# Altium PCB IRsense.PcbDoc
Units mil, origin at the board's own origin, x right, y up, seen from the top; angles counter-clockwise.
Board outline 1250 x 2200 mil, 2 copper layers (Top Layer, Bottom Layer); 25 components, 20 nets, 72 pads, 1 vias.
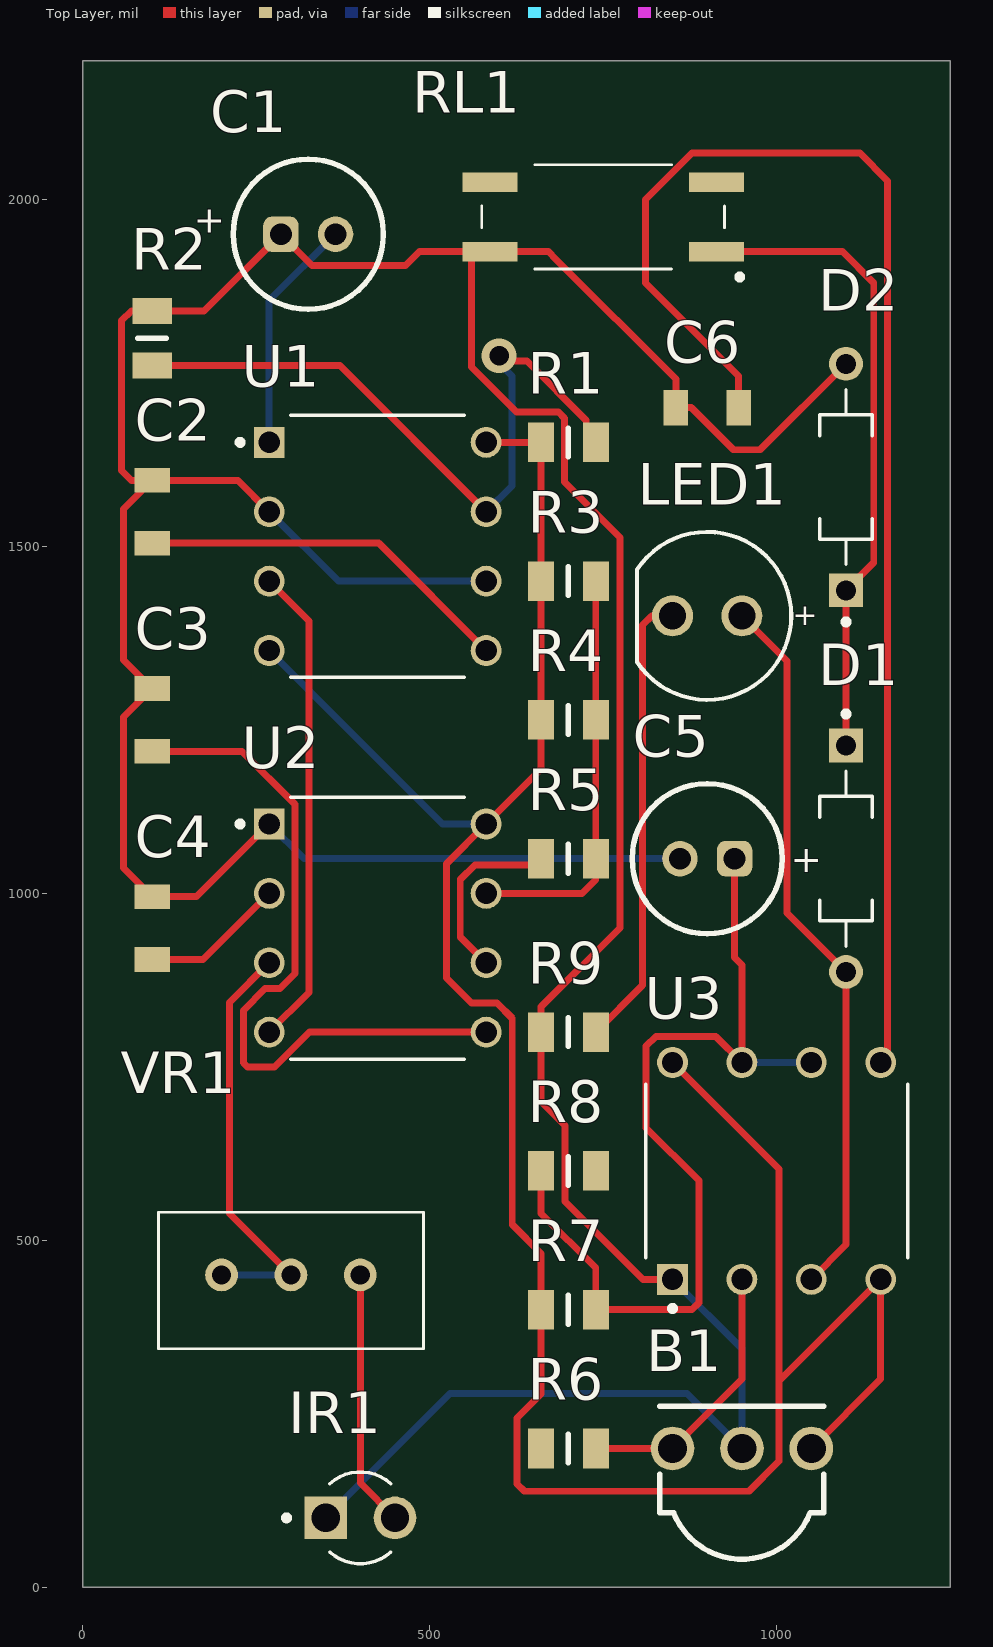
[diagram p0: Top Layer view]
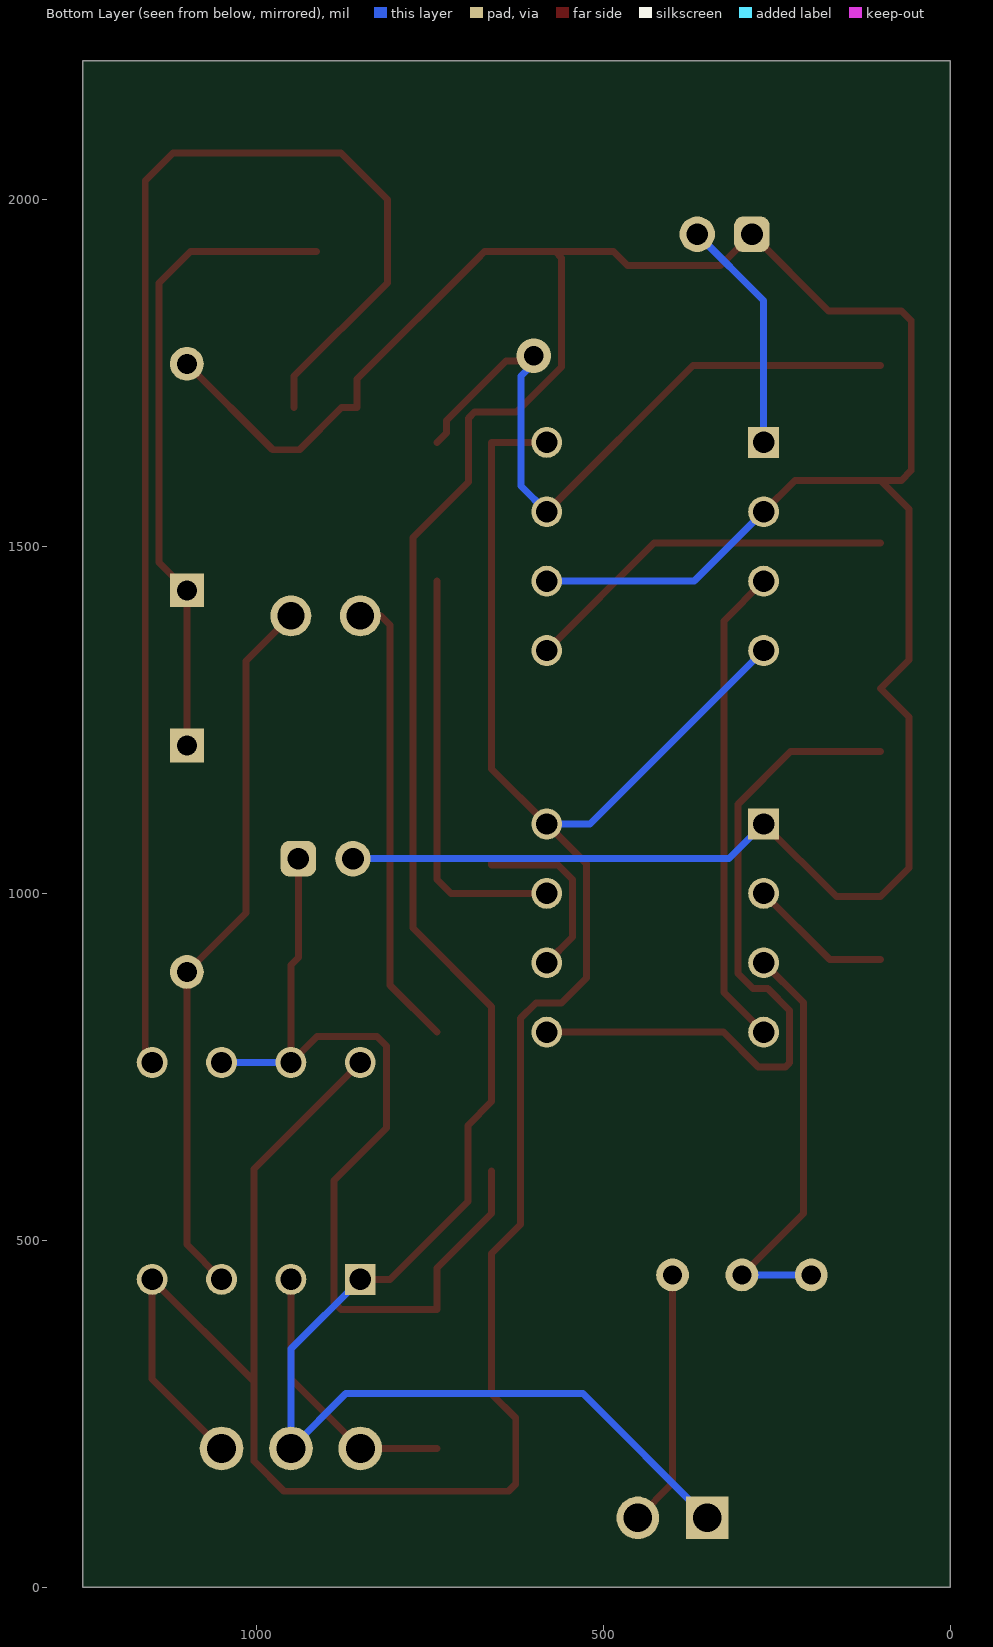
[diagram p1: Bottom Layer view, seen from below]
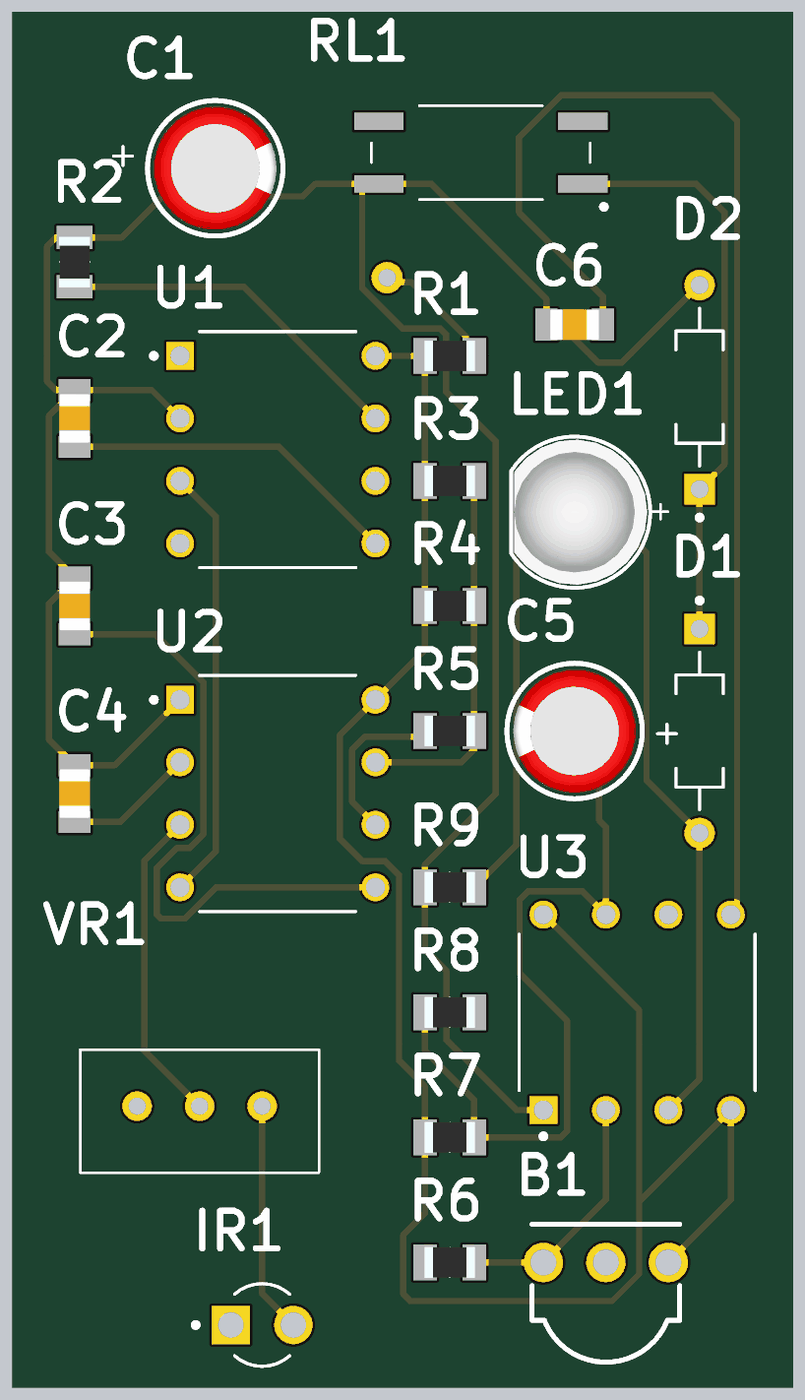
[diagram p2: 3D render of the assembled board from above, using the file's embedded part models]

## Layer stack, top to bottom
Top Solder: solder mask 0.4, Solder Resist, Dk 3.5
Top Layer: signal copper 1.4
Dielectric 1: dielectric 12.6, FR-4, Dk 4.8
Bottom Layer: signal copper 1.4
Bottom Solder: solder mask 0.4, Solder Resist, Dk 3.5

## Board outline
0,0 1250,0 1250,2200 0,2200

## Design rules (kind name [scope] priority, off if disabled: settings)
Clearance [All] p1: gap=10 ignorepadtopadclearanceinfootprint=FALSE except(0: Arc-Hole Track-Hole SMDPad-Hole THPad-Hole Via-Hole Fill-Hole Poly-Hole Region-Hole Text-Hole)
PolygonConnect [All] p1: connectstyle=Relief reliefconductorwidth=10 reliefentries=4 polygonreliefangle="90 Angle" airgapwidth=10
RoutingVias [All] p1: holewidth=28 width=50 viastyle="Through Hole" minholewidth=28 minwidth=50 maxholewidth=28 maxwidth=50
SilkToSilkClearance [All] p1: silktosilkclearance=5
SilkToSolderMaskClearance [IsPad] p1: minsilkscreentomaskgap=5 clearancetoexposedcopper=TRUE
SolderMaskExpansion [All] p1: expansion=4 istentingtop=FALSE
Width [All] p1: maxlimit=10 minlimit=10 preferedwidth=10
28 further rules are at their usual default settings.

## Classes and differential pairs
component class ProxSensorType2_Transmit: C1 C2 C3 C4 IR1 R1 R2 R3 R4 R5 U1 U2 VR1
component class ProxSensorType2_Recieve: B1 C5 C6 D1 D2 LED1 Q1 R6 R7 R8 R9 RL1 U3

## Components (designator, comment, footprint, x,y, rotation, side; value= is the part's Value field where it differs from the comment)
B1 "TSSP4038" TSSP4038 950,261.02 r0 top
C1 "1µF" WCAP-ATG8_D5H11 325,1950 r180 top (schematic designator C1b)
C2 "0,01uF" WCAP-CSGP_0805_L2W1.25H0.8_Wave 100,1550 r270 top (schematic designator C2b)
C3 "0,01uF" WCAP-CSGP_0805_L2W1.25H0.8_Wave 100,1250 r90 top
C4 "0,01uF" WCAP-CSGP_0805_L2W1.25H0.8_Wave 100,950 r90 top
C5 "4,7µF" WCAP-ATG8_D5H11 900,1050 r0 top
C6 "0,01uF" WCAP-CSGP_0805_L2W1.25H0.8_Wave 900,1700 r0 top
D1 "1N4148" DIOAD829W49L456D191 1100,1050 r270 top (schematic designator D1b)
D2 "1N4148" DIOAD829W49L456D191 1100,1600 r90 top (schematic designator D2b)
IR1 "TSAL4400" LEDRD254W45D335H610 400,100 r0 top
LED1 "Super Red, 2.1V, 40°" WL-TMRC_D5.9H8.7 900,1400 r180 top
R1 "1k" RESC2012X50N 700,1650 r180 top (schematic designator R1b)
R2 "5,6k" RESC2012X50N 100,1800 r270 top
R3 "5,6k" RESC2012X50N 700,1450 r180 top (schematic designator R3b)
R4 "5,6k" RESC2012X50N 700,1250 r180 top
R5 "470" RESC2012X50N 700,1050 r0 top
R6 "10k" RESC2012X50N 700,200 r0 top
R7 "470k" RESC2012X50N 700,400 r180 top
R8 "100 Ohm" RESC2012X50N 700,600 r0 top
R9 "4,7k" RESC2012X50N 700,800 r0 top
RL1 "9913-05-20TR" 99130520TR 750,1975 r180 top
U1 "NE555P" DIP794W45P254L959H508Q8 425,1500 r0 top (schematic designator U1b)
U2 "NE555P" DIP794W45P254L959H508Q8 425,950 r0 top (schematic designator U2b)
U3 "NE555P" DIP794W45P254L959H508Q8 1000,600 r90 top
VR1 "T93YA101KT20" T93YA5K10 300,442.13 r90 top

## Footprints (in the part's own frame and the unit in brackets; to place one, negate y for a bottom-side part, rotate by r counter-clockwise, add the part's x,y. Pads: shape width x height; smd on the part's side, far side on the other; paste and mask are expansions set on the pad)
99130520TR [mm]
  rect 2.01x0.71 smd: 1(-4.145,1.27) 2(4.145,1.27) 3(-4.145,-1.27) 4(4.145,-1.27)
  silkscreen extent -5.1,-1.91 4.44,2.3, body extent -7.37,-3.05 7.24,3.43, height 0.25
DIOAD829W49L456D191 [mm]
  round 1.238 hole 0.73: A(4.146,0)
  rect 1.238x1.238 / inner round 1.238 / far side rect 1.238x1.238 hole 0.73: C(-4.146,0)
  silkscreen extent -5.4,-0.96 3.2,0.96, body extent -5.59,-1.27 5.33,1.27, height 0.25
DIP794W45P254L959H508Q8 [mm]
  rect 1.13x1.13 hole 0.78: 1(-3.97,3.81)
  round 1.13 hole 0.78: 2(-3.97,1.27) 3(-3.97,-1.27) 4(-3.97,-3.81) 5(3.97,-3.81) 6(3.97,-1.27) 7(3.97,1.27) 8(3.97,3.81)
  silkscreen extent -5.13,-4.8 3.17,4.8
LEDRD254W45D335H610 [mm]
  round 1.56 hole 1.04: A(1.27,0)
  rect 1.56x1.56 hole 1.04: C(-1.27,0)
  silkscreen extent -2.8,-1.68 1.12,1.68
RESC2012X50N [mm]
  rect 0.95x1.45 smd: 1(-1,0) 2(1,0)
  silkscreen extent 0,-0.53 0,0.53, body extent -1.02,-0.63 1.02,0.63, height 0.5
T93YA5K10 [mm]
  round 1.2 hole 0.7: 1(0.2,-2.54) 2(0.2,0) 3(0.2,2.54)
  silkscreen extent -2.5,-4.85 2.5,4.85, body extent -6.1,-6.6 6.1,6.48, height 0.25
TSSP4038 [mm]
  round 1.6 hole 1.06: 1(-2.54,-1.55) 2(0,-1.55) 3(2.54,-1.55)
  silkscreen extent -3,-5.6 3,0, body extent -3.75,-6.24 3.75,0.51, height 0.25
WCAP-ATG8_D5H11 [mm] "Aluminum Electrolytic Capacitors, 5x11mm"
  rrect50% 1.3x1.3 hole 0.8: 1(1,0)
  round 1.3 hole 0.8: 2(-1,0)
  silkscreen extent -2.75,-2.75 2.75,2.75, body extent -2.49,-2.5 2.5,2.5, height 11.31
WCAP-CSGP_0805_L2W1.25H0.8_Wave [mm] "Ceramic Capacitors, body 2x1.25mm"
  rect 0.9x1.3 smd: 1(-1.15,0) 2(1.15,0)
  body extent -1,-0.63 1,0.63, height 0.8
WL-TMRC_D5.9H8.7 [mm] "THT Mono-color Round Color LED, 2-leads"
  round 1.5 hole 1: 1(-1.27,0) 2(1.27,0)
  silkscreen extent -3.07,-3.07 2.58,3.08, body extent -2.95,-2.95 2.45,2.95, height 9.2

## Part data
B1: "IR Receiver Module 38KHz 25m EMI 3-Pin Vishay TSSP4038, 38kHz IR Receiver, 950nm +/-45 , 25m Range, 2.5V - 5V, Through Hole, 6 x 3.9 x 6.95mm", Manufacturer_Name=Vishay, Mouser Part Number=782-TSSP4038, Datasheet Link=https://componentsearchengine.com/Datasheets/2/TSSP4038.pdf, Manufacturer_Part_Number=TSSP4038, Mouser Price/Stock=https://www.mouser.co.uk/ProductDetail/Vishay-Semiconductors/TSSP4038?qs=lgjwDzixuo3Ja5hn%252BEmOdw%3D%3D
C1 C5: library part 860010272005, "WCAP-ATG8 Aluminum Electrolytic Capacitor, Radial, THT, D5 x H11mm, 100µF, 10V", Capacitance=100µF, Capacitance Tolerance=+/-20%, Leakage Current=10µA, Manufacturer="Wurth Elektronik", Operating Temperature Max=85°C, Operating Temperature Min=-40°C, Rated Voltage (DC)=10V, Ripple Current=198mA, Category="Aluminum Electrolytic Capacitors", ComponentLink1Description="Website Link", ComponentLink1URL=https://www.we-online.com/redexpert/article/860010272005?ad, ComponentLink2Description="Datasheet Link", ComponentLink2URL=https://www.we-online.com/redexpert/spec/860010272005?ad, Diameter=5mm, Dissipation Factor=19%, Endurance=2000h, Height=11mm, Manufacturer Part Number=860010272005, Match Code=WCAP-ATG8, Mount="Through Hole", Packaging="Ammo Pack", Technical Reference=ATBC110101M010DSPA3B000
C2 C3 C4 C6: library part 885012004008, "WCAP-CSGP Multilayer Ceramic Chip Capacitor, General Purpose, size 0201, NP0 Class I, 22pF, 25VDC", Capacitance=22pF, Capacitance Tolerance=+/-5%, Case/Size Code=0201, Insulation Resistance=10GΩ, Manufacturer="Wurth Elektronik", Operating Temperature Max=125°C, Operating Temperature Min=-55°C, Rated Voltage (DC)=25V, Category="Multilayer Ceramic Chip Capacitors", Ceramic Type="NP0 Class I", ComponentLink1Description="Website Link", ComponentLink1URL=https://www.we-online.com/redexpert/article/885012004008?ad, ComponentLink2Description="Datasheet Link", ComponentLink2URL=https://www.we-online.com/redexpert/spec/885012004008?ad, Height=0.3mm, Length=0.6mm, Manufacturer Part Number=885012004008, Match Code=WCAP-CSGP, Mount="Surface Mount", Packaging="Tape and Reel", Q Factor=840, Technical Reference=NP00201220J025DFCT10000, Width=0.3mm
D1 D2: "Diode Standard 75V 200mA Surface Mount SOD-523F", Package="AXIAL LEAD-2 ON Semiconductor", Availability="In Stock", Check_prices=https://www.snapeda.com/parts/1N4148/Onsemi/view-part/?ref=eda, MF="ON Semiconductor", MP=1N4148, Price=None, Purchase-URL=https://pricing.snapeda.com/search/part/1N4148/?ref=eda, SnapEDA_Link=https://www.snapeda.com/parts/1N4148/Onsemi/view-part/?ref=snap
IR1: "Infrared Emitter 940nm 36mW/sr Circular Top Mount 2-Pin T-1 Bulk", Package="Radial Vishay", Availability=Unavailable, MF="Vishay Semiconductor", MP=TSAL4400, Price=None, SnapEDA_Link=https://www.snapeda.com/parts/TSAL4400/Vishay%20Semiconductor%20Opto%20Division/view-part/3623381/?ref=snap
LED1: library part LED_151051SS04000, "WL-TMRC Mono-color Round Color, THT, D5.9 x H8.7mm, Super Red, 2.1V, 40°", Case/Size Code=5mm, Emitting Color="Super Red", Forward Voltage=2.1V, Manufacturer="Wurth Elektronik", Manufacturer Part Number=151051SS04000, Operating Temperature Max=85°C, Operating Temperature Min=-40°C, Category="Signal LEDs", Chip Technology=AlInGaP, ComponentLink1Description="Website Link", ComponentLink1URL=https://www.we-online.com/redexpert/article/151051SS04000?ad, ComponentLink2Description="Datasheet Link", ComponentLink2URL=https://www.we-online.com/redexpert/spec/151051SS04000?ad, Diameter=5.9mm, Dominant Wavelength=635nm, Height=8.7mm, Luminous Intensity=250mcd, Match Code=WL-TMRC, Mount="Through Hole", Packaging=Bulk, Peak Wavelength=640nm, Viewing Angle=40°
R1 R2 R3 R4 R5 R6 R7 R8 R9: library part "RESISTOR 0805", "4,7k Resistor 0805", Manufacturer="Vishay Dale", Part Number=TNPW080510K0BETA
RL1: "RELAY STANDARD REED, 5V, 200 OHMS, J FORM, TR. / TAPE-REEL", Manufacturer_Name="Coto Technology", Mouser Part Number=816-9913-05-20TR, Datasheet Link=https://componentsearchengine.com/Datasheets/1/9913-05-20TR.pdf, Geometry.Height=3.61mm, Manufacturer_Part_Number=9913-05-20TR, Mouser Price/Stock=https://www.mouser.co.uk/ProductDetail/Coto-Technology/9913-05-20TR?qs=BJlw7L4Cy7%2Ft0vFUsUT%2FEw%3D%3D
U1 U2 U3: Package=None, Availability=Unavailable, MP=NE555P, Price=None
VR1: "100, Through Hole Trimmer Potentiometer 0.5W Top Adjust Vishay, T93", Manufacturer_Name=Vishay, Mouser Part Number=72-T93YA-100, Datasheet Link=https://www.vishay.com/docs/51026/t93.pdf, Geometry.Height=9mm, Manufacturer_Part_Number=T93YA101KT20, Mouser Price/Stock=https://www.mouser.co.uk/ProductDetail/Vishay-Sfernice/T93YA101KT20?qs=iVq8I%252Bwveq19HOEubYKU9A%3D%3D

## Via types
v1: diameter 50, hole 28, Top Layer to Bottom Layer, 1 vias

## Nets (pads, with @x,y where several pads share a name; then routed paths per layer and width w, separated by ;. In a path a pad name is that pad's centre, name@x,y a point inside that pad or via, vN(x,y) a via of type N, cw(c..) or ccw(c..) an arc to the next point about the centre after c; other vN are vias at no path point)
+5: B1.3 R1.2 R3.2 R4.2 R7.2 U1.4 U1.8 U2.8 U3.4 U3.8 | length 3673.7
  Top Layer w10: U1.8 R1.2 R3.2 R4.2 660.63,1179.33 U2.8 524,1042.7 524,878 560,842 597,842 619,820 619,522.63 660.63,481 R7.2 660.63,278.63 626,244 626,149 636.7,138.3 960,138.3 1002.59,180.89 ; U3.8 1003.3,603 1003.3,181.6 ; 1004.3,298 U3.4 1150,300 B1.3
  Bottom Layer w10: U1.4 518.7,1100 U2.8
GND: B1.2 C1.1 C2.1 C3.2 C4.2 C5.2 C6.1 D2.A IR1.C R2.1 R9.1 RL1.2 U1.2 U1.6 U2.1 U3.1 | length 6373.9
  Top Layer w10: U2.1 163.98,995.28 C4.2 59,1036.28 59,1254.28 C3.2 59,1336.28 59,1554.28 C2.1 ; U1.2 223.42,1595.28 C2.1 ; U3.1 807.3,443.7 695,556 695,665.63 660.63,700 R9.1 660.63,836.63 774,950 774,1513 694.33,1592.67 694.33,1684.76 685.54,1693.54 624.89,1693.54 560,1758.43 560,1916.02 568.98,1925 RL1.2@575,1925 ; D2.A 976.18,1639.41 937.59,1639.41 877,1700 C6.1 854.72,1741.28 682.22,1913.78 671,1925 RL1.2 RL1.2@575,1925 ; C2.1 70,1595.28 56,1609.28 56,1825.37 70,1839.37 R2.1 175,1839.37 C1.1 330.63,1905 465,1905 485,1925 RL1.2@575,1925
  Bottom Layer w10: U2.1 318.7,1050 C5.2 ; U1.2 368.7,1450 U1.6 ; IR1.C 529,279 871,279 B1.2 950,343.7 U3.1
NetB1_1: B1.1 R6.2 U3.2 | length 395.8
  Top Layer w10: R6.2 B1.1 950,300 U3.2
NetC1b_2: C1.2 U1.1 | length 339.6
  Bottom Layer w10: U1.1 268.7,1854.33 C1.2
NetC2b_2: C2.2 U1.5 | length 545.4
  Top Layer w10: C2.2 426.58,1504.72 U1.5
NetC3_1: C3.1 U2.5 | length 1026.5
  Top Layer w10: C3.1 229.68,1204.72 305.94,1128.46 305.94,884.57 284.13,862.76 262.76,862.76 231.45,831.45 231.45,755.86 237.31,750 276.45,750 326.45,800 U2.5
NetC4_1: C4.1 U2.2 | length 208.2
  Top Layer w10: C4.1 173.42,904.72 U2.2
NetC5_1: C5.1 R7.1 R8.1 U3.6 U3.7 | length 1344.4
  Top Layer w10: R8.1 660.63,538.74 739.37,460 R7.1 878,400 888,410 888,586 812,662 812,780 826,794 912.3,794 U3.7 950,897 939.37,907.63 C5.1
  Bottom Layer w10: U3.7 U3.6
NetC6_2: C6.2 U3.5 | length 2030.2
  Top Layer w10: C6.2 945.28,1745.72 811,1880 811,2000 878,2067 1120,2067 1160,2027 1160,756 1150,756 U3.5
NetD1b_A: D1.A LED1.1 U3.3 | length 1039.1
  Top Layer w10: LED1.1 1015,1334.99 1015,971.77 D1.A 1100,493.7 U3.3
NetD1b_C: D1.C D2.C RL1.1 | length 928.8
  Top Layer w10: RL1.1 1095,1925 1140,1880 1140,1476.77 D2.C D1.C
NetIR1_A: IR1.A VR1.1 | length 370.7
  Top Layer w10: VR1.1 400,150 IR1.A
NetLED1_2: LED1.2 R9.2 | length 663.4
  Top Layer w10: R9.2 807,867.63 807,1386.99 820,1399.99 LED1.2
NetQ1_2: R6.1
NetQ1_3: R8.2
NetR1b_1: R1.1 R2.2 U1.7 | length 1018.3
  Top Layer w10: R2.2 370.67,1760.63 U1.7 ; v1(600,1775) 607.63,1767.37 640,1767.37 725.67,1681.7 725.67,1663.7 R1.1
  Bottom Layer w10: U1.7 618.54,1587.24 618.54,1745.63 600,1764.18 v1(600,1775)
NetR3b_1: R3.1 R4.1 R5.2 U2.7 | length 596.4
  Top Layer w10: U2.7 719.37,1000 739.37,1020 R5.2 R4.1 R3.1
NetR5_1: R5.1 U2.6 | length 269.8
  Top Layer w10: U2.6 544,937.3 544,1020 565,1041 660.63,1041 R5.1
NetU1b_3: U1.3 U2.4 | length 697.4
  Top Layer w10: U2.4 325.95,857.25 325.95,1392.75 U1.3
NetU2b_3: U2.3 VR1.2 VR1.3 | length 610.4
  Top Layer w10: U2.3 211.45,842.75 211.45,538.55 VR1.2
  Bottom Layer w10: VR1.3 VR1.2
pads on no net: RL1.3 RL1.4

## Text inside footprints (layer, text, board x,y; h text height)
C1: Top Overlay "+" at 205,1985 h39.37 r180
C5: Top Overlay "+" at 1020.08,1030.32 h39.37
LED1: Top Overlay "+" at 1059.45,1412.99 h31.5 r180